# Altium PCB B&D PFC.PcbDoc
Units mil, origin at the board's own origin, x right, y up, seen from the top; angles counter-clockwise.
Board outline 2277 x 1677 mil, 2 copper layers (TopLayer, BottomLayer); 52 components, 31 nets, 197 pads, 23 vias.
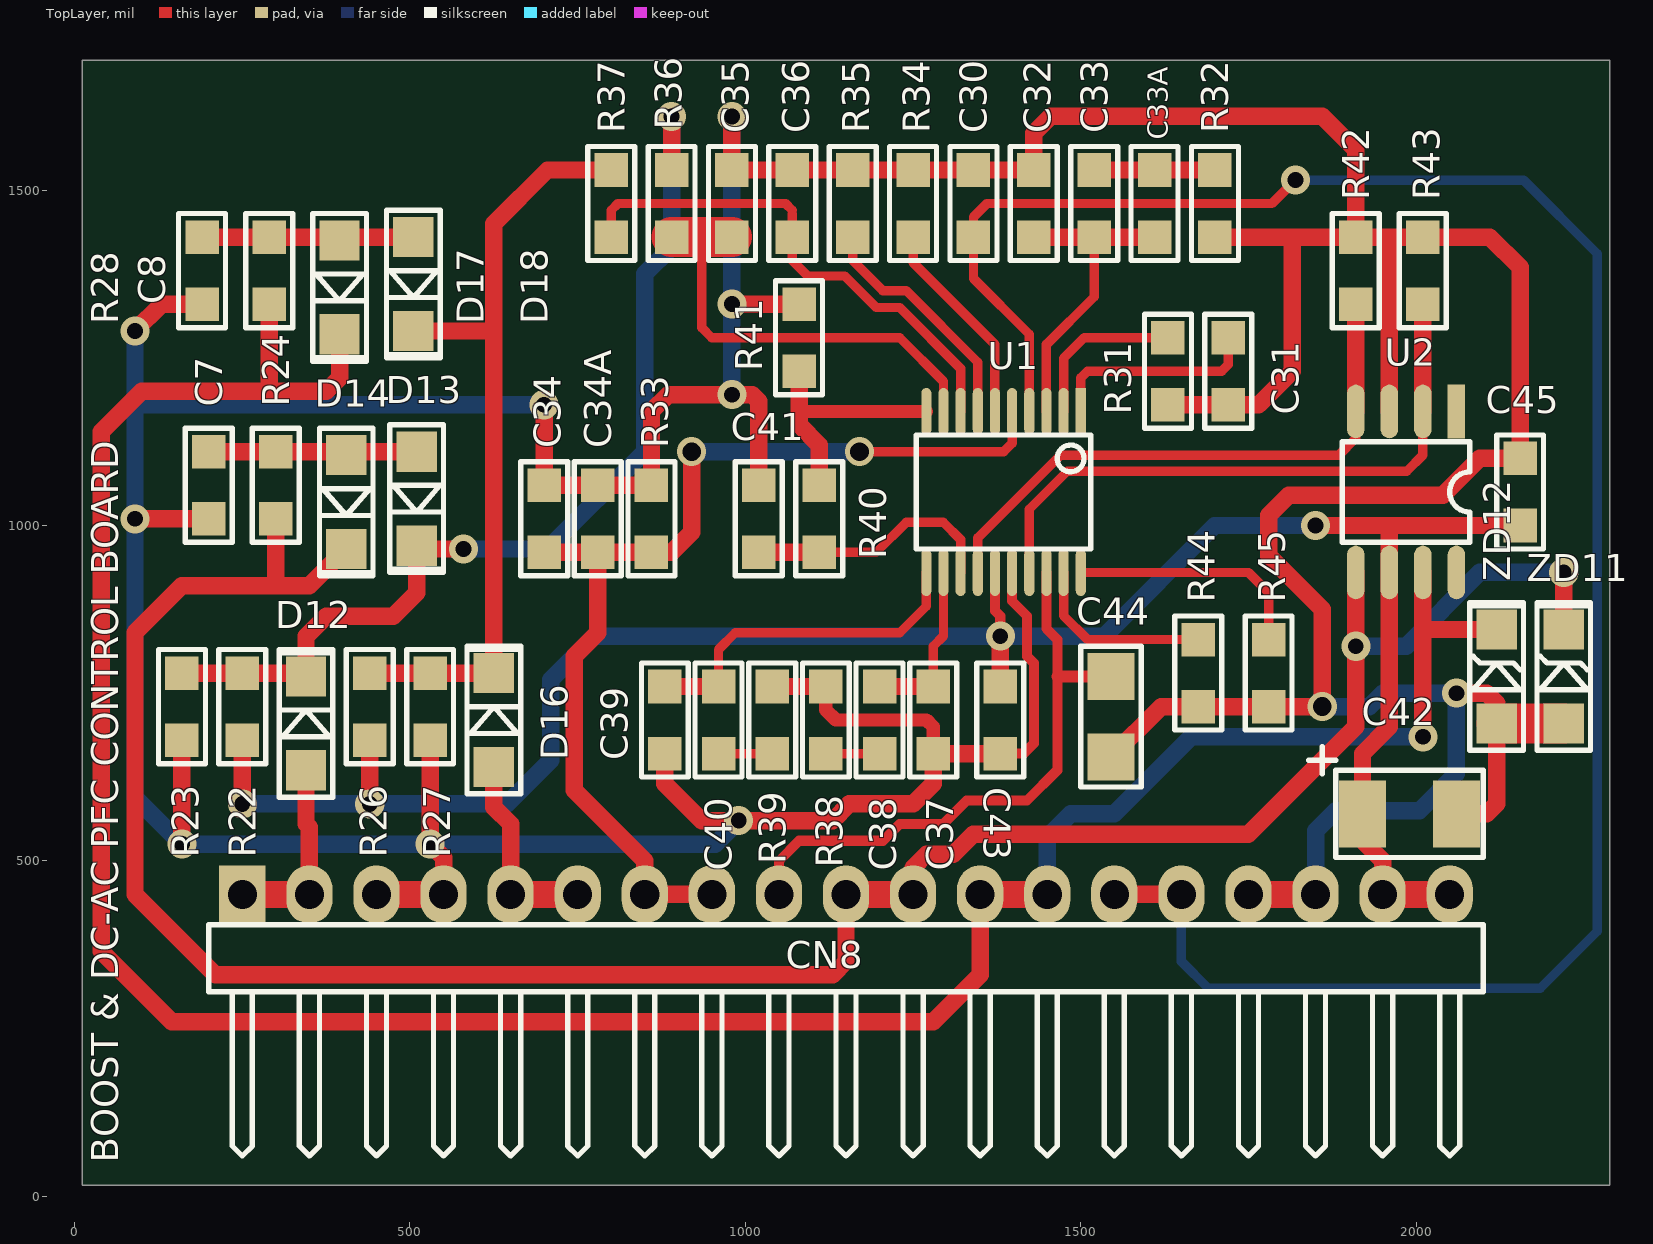
[diagram p0: TopLayer view]
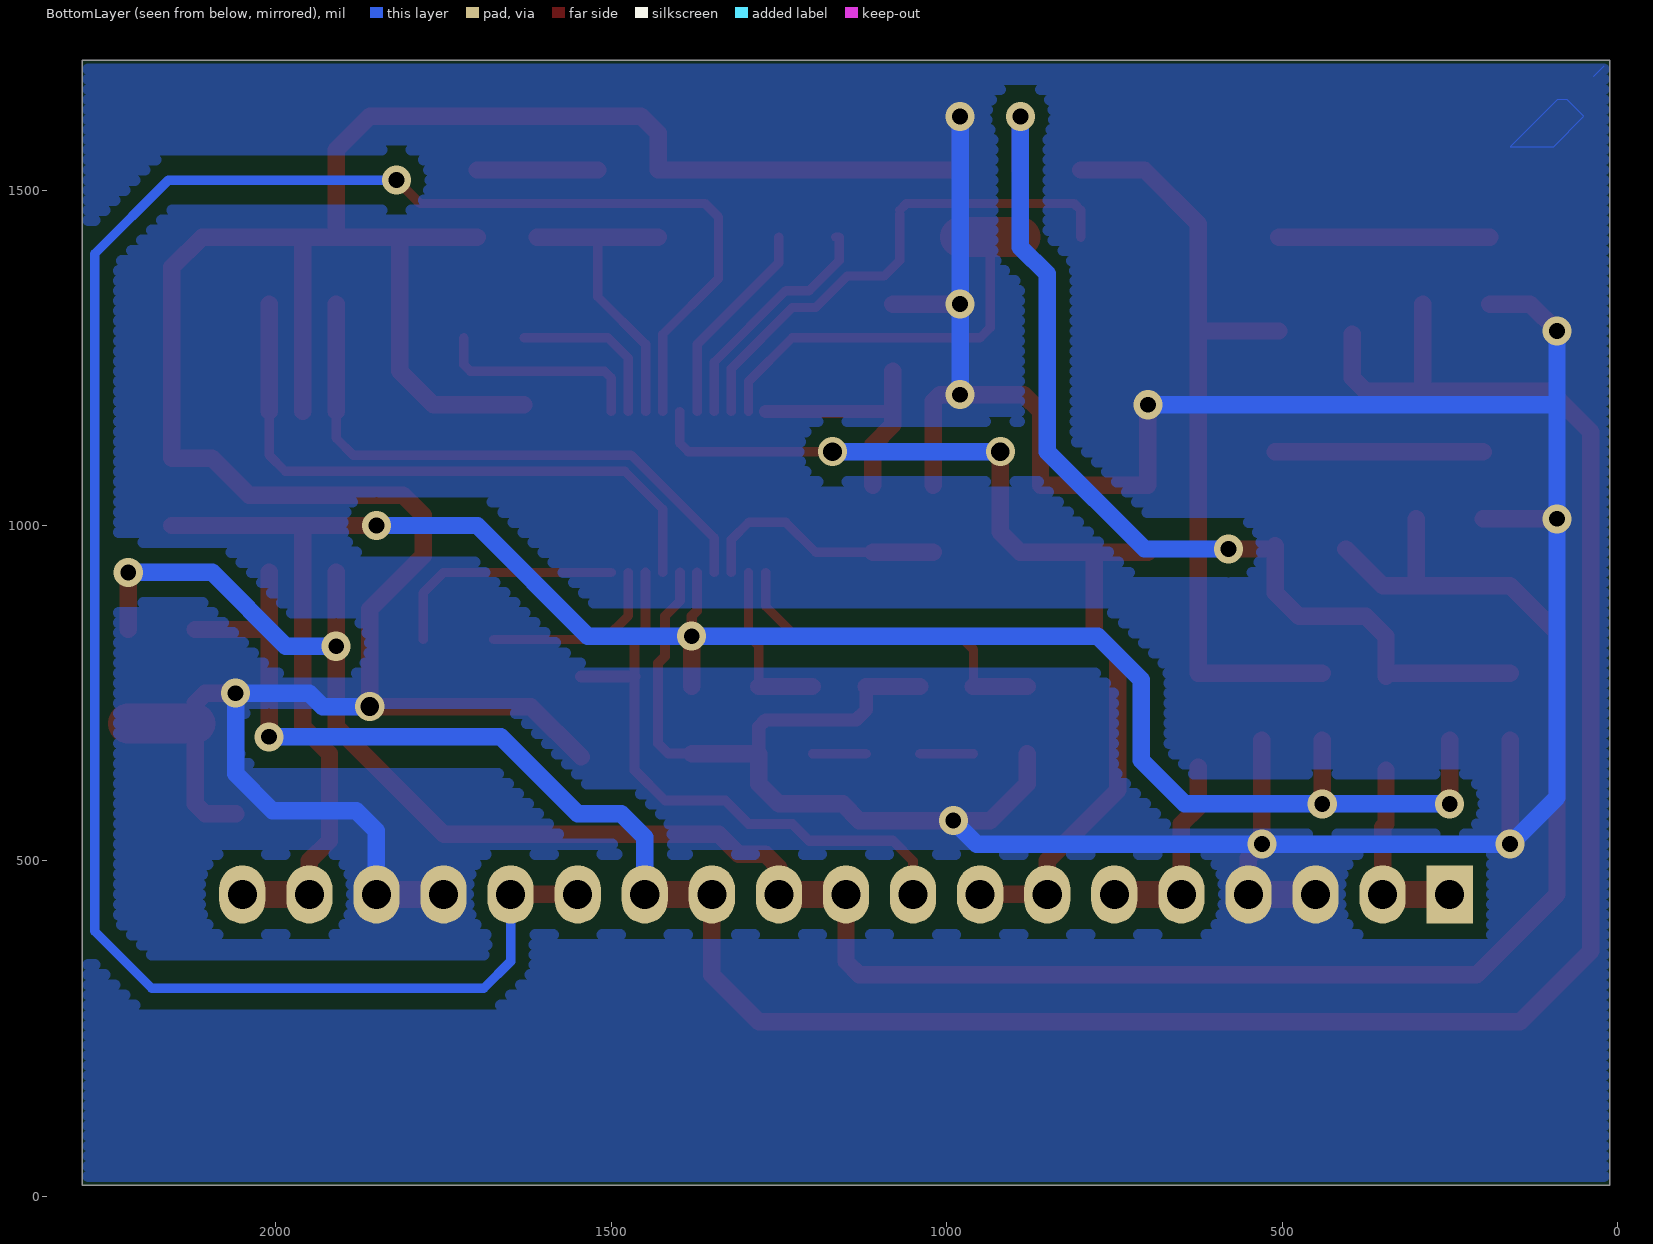
[diagram p1: BottomLayer view, seen from below]

## Layer stack, top to bottom
TopSolder: solder mask 0.4, Solder Resist, Dk 3.5
TopLayer: signal copper 1.4
Dielectric1: dielectric 12.6, FR-4, Dk 4.8
BottomLayer: signal copper 1.4
BottomSolder: solder mask 0.4, Solder Resist, Dk 3.5

## Board outline
11.5,16.5 2288.5,16.5 2288.5,1693.5 11.5,1693.5

## Design rules (kind name [scope] priority, off if disabled: settings)
Clearance Clearance_1 [All vs (InPoly)] p1: gap=20 ignorepadtopadclearanceinfootprint=FALSE
Clearance [All] p2: gap=10 ignorepadtopadclearanceinfootprint=FALSE
FabricationTestPointUsage TestPointUsage [All] p1: valid=0 allowmultiple=FALSE
FabricationTestpoint Testpoint [All] p1: side=3 testpointundercomponent=TRUE minsize=40 maxsize=100 preferedsize=60 minholesize=20 maxholesize=40 preferedholesize=32 testpointgrid=1 allowsidetop=TRUE allowsidebottom=TRUE usegrid=TRUE gridtolerance=0.01
PolygonConnect PolygonConnect_1 [All] p1: connectstyle=Direct reliefconductorwidth=10 reliefentries=4 polygonreliefangle="90 Angle" airgapwidth=10
RoutingVias [All] p1: holewidth=28 width=43.31 viastyle="Through Hole" minholewidth=28 minwidth=39.37 maxholewidth=39.37 maxwidth=47.24
SolderMaskExpansion SolderMaskExpansion_3 [(InPoly)] p1: expansion=20
SolderMaskExpansion [All] p2: expansion=5
Width [All] p1: maxlimit=300 minlimit=10 preferedwidth=15
28 further rules are at their usual default settings.

## Classes and differential pairs
component class RTFPow: C43 PC41 RM
component class RTFMain: CY5 CY6 R2 RM
component class PFPower: C7 CY5 F.S1 LED1 P1 PC1 PT1 R2 RM U1 U2 U4 ZNR1
component class IA02-71Power&Output: C7 C29A CN9 F.S1 JP1 JP1(NM) JP2 JP3 P2 PC1 PC2 R2 RM RY1 RY2 U1 U4 U6 ZNR1
component class IA02-53Power&Output: C7 C29A CN9 F.S1 JP1 JP1(NM) JP2 JP3 P2 PC1 PC2 R2 RM RY1 RY2 U1 U4 U6 ZNR1
component class IA02-52Power&Output: C7 C29A CN9 F.S1 JP1 JP1(NM) JP2 JP3 P2 PC1 PC2 R2 RM RY1 RY2 U1 U4 U6 ZNR1
component class IA02-34Power&Output: C7 C29A CN9 F.S1 JP1 JP1(NM) JP2 JP3 P2 R2 RM RY1 RY2 U1 U4 U6
component class Power&Out: C7 C29A CN9 F.S1 JP1 JP1(NM) JP2 JP3 P2 R2 RM RY1 RY2 U1 U4 U6
component class Power&COM: C7 C9 C29A F.S1 P1 PC1 R2 RM U1 U2 U4 U6 U8
component class Power&Communication: C7 C9 C29A F.S1 J32 P1 PC1 R2 RM U1 U2 U4 U6
component class Power: C7 C29A F.S1 J31 P1 R2 RM U1 U6
component class RLY+AO: C7 C29A CN2-2 F.S1 JP1 JP1(NM) JP2 JP3 P2 R2 RM RY1 RY2 U1 U4 U6
component class IA02-33Power&Output: C7 C29A CN9 F.S1 JP1 JP1(NM) JP2 JP3 P2 R2 RM RY1 RY2 U1 U4 U6
component class IA02-41Power&Output: C7 C29A CN9 F.S1 JP1 JP1(NM) JP2 JP3 P2 PC1 R2 RM RY1 RY2 U1 U4 U6 ZNR1
component class IA02-51Power&Output: C7 C29A CN9 F.S1 JP1 JP1(NM) JP2 JP3 P2 PC1 R2 RM RY1 RY2 U1 U4 U6 ZNR1
component class IA02-61Power&Output: C7 C29A CN9 F.S1 JP1 JP1(NM) JP2 JP3 P2 PC1 PC2 R2 RM RY1 RY2 U1 U4 U6 ZNR1
component class SMCPower: C7 CN7 CY5 F.S1 LED1 P1 PC1 R2 RM U1 U2 U4 ZNR1
component class BCEMain: CY5 CY6 PT1 R2 RM
component class BCEPow: C43 PC41 RM

## Components (designator, comment, footprint, x,y, rotation, side; value= is the part's Value field where it differs from the comment)
C7 "0.047U" 2012(0805)-2.54 200,1060 r270 top
C8 "0.047U" 2012(0805)-2.54 190,1380 r270 top
C30 "3300P" 2012(0805)-2.54 1340,1480 r270 top
C31 "470P" 2012(0805)-2.54 1720,1230 r90 top
C32 "0.15U" 2012(0805)-2.54 1430,1480 r270 top
C33 "0.47U" 2012(0805)-2.54 1520,1480 r270 top
C33A "1U" 2012(0805)-2.54 1610,1480 r270 top
C34 "1000P" 2012(0805)-2.54 700,1010 r90 top
C34A "220P" 2012(0805)-2.54 780,1010 r90 top
C35 "220P" 2012(0805)-2.54 980,1480 r90 top
C36 "220P" 2012(0805)-2.54 1070,1480 r90 top locked
C37 "1000P" 2012(0805)-2.54 1280,710 r270 top
C38 "2200P" 2012(0805)-2.54 1200,710 r90 top
C39 "1000P" 2012(0805)-2.54 880,710 r90 top
C40 "2200P" 2012(0805)-2.54 960,710 r90 top
C41 "0.1U" 2012(0805)-2.54 1020,1010 r270 top
C42 "10U/16V" "CAP P 3528" 1990,570 r0 top
C43 "0.1U" 2012(0805)-2.54 1380,710 r270 top
C44 "10U/10V" 3216(1206)-3.05 1545,715 r90 top
C45 "0.1U" 2012(0805)-2.54 2155,1050 r90 top
CN8 "PIN HDR 1*19-90" "PIN HDR 1*19-90" 1150,450 r0 top locked
D12 "1N4148" D3515 345,705 r90 top
D13 "1N4148" D3515 510,1040 r270 top
D14 "1N4148" D3515 405,1035 r270 top
D16 "1N4148" D3515 625,710 r90 top
D17 "1N4148" D3515 505,1360 r270 top
D18 "1N4148" D3515 395,1355 r270 top
R22 "3.6K" 2012(0805)-2.54 250,730 r90 top
R23 "20" 2012(0805)-2.54 160,730 r90 top
R24 "3K" 2012(0805)-2.54 300,1060 r90 top
R26 "3.6K" 2012(0805)-2.54 440,730 r90 top
R27 "20" 2012(0805)-2.54 530,730 r90 top
R28 "3K" 2012(0805)-2.54 290,1380 r90 top
R31 "56K" 2012(0805)-2.54 1630,1230 r270 top
R32 "100K" 2012(0805)-2.54 1700,1480 r90 top
R33 "24K" 2012(0805)-2.54 860,1010 r270 top
R34 "20K" 2012(0805)-2.54 1250,1480 r90 top
R35 "39K" 2012(0805)-2.54 1160,1480 r270 top
R36 "1K" 2012(0805)-2.54 890,1480 r90 top locked
R37 "1K" 2012(0805)-2.54 800,1480 r90 top locked
R38 "3.9K" 2012(0805)-2.54 1120,710 r270 top
R39 "3.9K" 2012(0805)-2.54 1040,710 r270 top
R40 "3.3K" 2012(0805)-2.54 1110,1010 r270 top
R41 "5.1K" 2012(0805)-2.54 1080,1280 r270 top
R42 "10K" 2012(0805)-2.54 1910,1380 r270 top
R43 "10K" 2012(0805)-2.54 2010,1380 r90 top
R44 "220K" 2012(0805)-2.54 1675,780 r270 top
R45 "1K" 2012(0805)-2.54 1780,780 r270 top
U1 "UCC28070" TSSOP20-240-0.65 1500,1170 r180 top
U2 "IXDN602" SO8-240-1.27 2060,1170 r180 top
ZD11 "18V" DZ3515-3.56 2220,775 r90 top
ZD12 "18V" DZ3515-3.56 2120,775 r90 top

## Footprints (in the part's own frame and the unit in brackets; to place one, negate y for a bottom-side part, rotate by r counter-clockwise, add the part's x,y. Pads: shape width x height; smd on the part's side, far side on the other; paste and mask are expansions set on the pad)
2012(0805)-2.54 [mm]
  rect 1.27x1.27 smd: 1(-1.27,0) 2(1.27,0)
  round 0.3 on Mech4: ""(0,0)
  silkscreen extent -2.16,-0.89 2.16,0.89
3216(1206)-3.05 [mil]
  rect 70x70 smd: 1(-60,0) 2(60,0)
  round 11.81 on Mech4: ""(0,0)
  silkscreen extent -105,-45 105,45
"CAP P 3528" [mil]
  rect 70x100 smd: 1(-70,0) 2(70,0)
  round 11.81 on Mech4: ""(0,0)
  silkscreen extent -150,-65 110,100
D3515 [mil]
  rect 60x60 smd: 1(-70,0) 2(70,0)
  round 11.81 on Mech4: ""(0,0)
  silkscreen extent -110,-40 110,40
DZ3515-3.56 [mil]
  rect 60x60 smd: 1(-70,0) 2(70,0)
  round 11.81 on Mech4: ""(0,0)
  silkscreen extent -110,-40 110,40
"PIN HDR 1*19-90" [mm]
  rect 1.75x2.2 hole 1.1: 1(-22.86,0)
  oval 1.75x2.2 hole 1.1: 2(-20.32,0) 3(-17.78,0) 4(-15.24,0) 5(-12.7,0) 6(-10.16,0) 7(-7.62,0) 8(-5.08,0) 9(-2.54,0) 10(0,0) 11(2.54,0) 12(5.08,0) 13(7.62,0) 14(10.16,0) 15(12.7,0) 16(15.24,0) 17(17.78,0) 18(20.32,0) 19(22.86,0)
  round 0.3 on Mech4: ""(0,0)
  silkscreen extent -24.13,-9.91 24.13,-1.14
SO8-240-1.27 [mil]
  rect 26x80 smd: 1(0,0)
  oval 26x80 smd: 2(50,0) 3(100,0) 4(150,0) 5(150,240) 6(100,240) 7(50,240) 8(0,240)
  round 11.81 on Mech4: ""(75,120)
  silkscreen extent -20,45 170,195
TSSOP20-240-0.65 [mil]
  rect 15x70 smd: 1(0,0)
  oval 15x70 smd: 2(25.59,0) 3(51.18,0) 4(76.77,0) 5(102.36,0) 6(127.95,0) 7(153.54,0) 8(179.13,0) 9(204.72,0) 10(230.32,0) 11(230.32,240) 12(204.72,240) 13(179.13,240) 14(153.54,240) 15(127.95,240) 16(102.36,240) 17(76.77,240) 18(51.18,240) 19(25.59,240) 20(0,240)
  round 11.81 on Mech4: ""(115.16,120)
  silkscreen extent -15,35 245,205

## Via types
v1: diameter 43.31, hole 23.62, TopLayer to BottomLayer, 20 vias
v2: diameter 43.31, hole 28, TopLayer to BottomLayer, 3 vias

## Nets (pads, with @x,y where several pads share a name; then routed paths per layer and width w, separated by ;. In a path a pad name is that pad's centre, name@x,y a point inside that pad or via, vN(x,y) a via of type N, cw(c..) or ccw(c..) an arc to the next point about the centre after c; other vN are vias at no path point)
+12V1: C42.1 C43.1 C45.1 CN8.18 CN8.19 R22.1 R26.1 U1.15 U2.6 | length 3195.7
  TopLayer w14: 1945,1000 1960,985
  TopLayer w15: U1.15 1372.05,872.95 1380,865 v1(1380,835)
  TopLayer w26: v1(250,585) R22.1 ; v1(440,585) R26.1 ; C43.1 v1(1380,835) ; v1(1850,1000) C45.1 ; CN8.18 1950,500 1920,530 1920,660 1960,700 1960,985
  TopLayer w40: CN8.18 CN8.19
  BottomLayer w26: v1(250,585) 645,585 710,650 710,770 775,835 1535,835 1700,1000 v1(1850,1000)
CSA: CN8.1 CN8.2 D12.1 | length 287.1
  TopLayer w26: D12.1 345,555 350,550 CN8.2
  TopLayer w40: CN8.1 CN8.2
CSB: CN8.5 CN8.6 D16.1 | length 300.4
  TopLayer w26: D16.1 625,580 650,555 CN8.5
  TopLayer w40: CN8.5 CN8.6
GDA: CN8.10 CN8.11 D14.2 R24.1 U2.5 ZD11.2 | length 3632.3
  TopLayer w26: 300,910 R24.1 ; D14.2 350,910 160,910 90,840 90,450 210,330 1130,330 1150,350 CN8.10 ; CN8.11 1250,490 1270,510 1310,510 1340,540 1450.91,540 1750,540 1910,700 U2.5 ; ZD11.2 v1(2220,930)
  TopLayer w40: CN8.10 CN8.11
  BottomLayer w26: v1(1910,820) 1985,820 2095,930 v1(2220,930)
GDB: CN8.12 CN8.13 D18.2 R28.1 U2.7 ZD12.2 | length 4022.8
  TopLayer w26: 290,1200 R28.1 ; D18.2 395,1220 375,1200 100,1200 40,1140 40,365 145,260 1280,260 1350,330 CN8.12 ; v1(2010,685) U2.7 ; 2010,845 ZD12.2
  TopLayer w40: CN8.12 CN8.13
  BottomLayer w26: CN8.13 1450,535 1485,570 1550,570 1665,685 v1(2010,685)
NetC8_1: C8.1 D17.1 D18.1 R28.2 | length 315
  TopLayer w26: C8.1 D17.1
NetC31_2: C31.2 U1.1 | length 318.3
  TopLayer w14: U1.1 1500,1220 1510,1230 1710,1230 1720,1240 C31.2
NetC33A_2: C32.2 C33.2 C33A.2 U1.3 | length 469.5
  TopLayer w14: U1.3 1448.82,1270 1520,1341.18 C33.2
  TopLayer w26: C32.2 C33A.2
NetC38_1: C38.1 R38.2 | length 80
  TopLayer w14: R38.2 C38.1
NetD13_2: D12.2 D13.2 R22.2 R23.2 R36.2 | length 1505.6
  TopLayer w26: R23.2 340,780 D12.2 345,835 375,865 475,865 510,900 D13.2 ; D13.2@510,965 v1(580,965) ; R36.2 v1@890,1595 ; 890,1580 v1(890,1610)
  BottomLayer w26: v1(580,965) 705,965 850,1110 850,1375 890,1415 v1@890,1595
NetR24_2: C7.1 D13.1 D14.1 R24.2 | length 310
  TopLayer w26: C7.1 D13.1
NetR31_1: R31.1 U1.2 | length 247.7
  TopLayer w14: U1.2 1474.41,1249.41 1505,1280 R31.1
NetR32_2: C33.1 C33A.1 R32.2 | length 180
  TopLayer w26: C33.1 R32.2
NetR34_1: R34.1 U1.6 | length 310.6
  TopLayer w14: R34.1 1250,1392.05 1372.05,1270 U1.6
NetR35_2: R35.2 U1.7 | length 362.7
  TopLayer w14: R35.2@1165,1430 R35.2 1160,1395 1205,1350 1240,1350 1346.46,1243.54 U1.7
NetR36_1: C35.1 R36.1 U1.9 | length 663.3
  TopLayer w14: 935,1430 935,1295 950,1280 1230,1280 1295.28,1214.72 U1.9
  TopLayer w60: R36.1 C35.1
NetR37_1: C36.1 R37.1 U1.8 | length 769.9
  TopLayer w14: R37.1 800,1470 810,1480 1060,1480 1070,1470 ; 1070,1465 1070,1395 1093,1372 1148,1372 1195,1325 1230,1325 1320.87,1234.13 U1.8
NetR37_2: D16.2 D17.2 R26.2 R27.2 R37.2 | length 1183.1
  TopLayer w26: R26.2 D16.2 625,1450 705,1530 R37.2 ; D17.2 625,1290
NetR39_2: C40.1 R39.2 | length 80
  TopLayer w14: C40.1 R39.2
NetR40_2: C41.2 R40.2 U1.13 | length 379.4
  TopLayer w14: R40.2 1195,960 1240,1005 1295,1005 1320.87,979.13 U1.13
  TopLayer w26: C41.2 R40.2
NetR41_2: R40.1 R41.2 U1.10 | length 367.1
  TopLayer w20: 1085,1170 U1.10
  TopLayer w26: R41.2 1080,1150 1110,1120 R40.1
NetU1_11: C39.2 C40.2 U1.11 | length 521.8
  TopLayer w14: C40.2 960,815 985,840 1230,840 1269.68,879.68 U1.11
  TopLayer w26: C39.2 C40.2
NetU1_12: C37.1 C38.2 U1.12 | length 256.3
  TopLayer w14: C37.1 1280,820 1295.28,835.28 U1.12
  TopLayer w26: C38.2 C37.1
NetU1_19: R44.1 U1.19 | length 279.7
  TopLayer w14: U1.19 1474.41,865.59 1510,830 R44.1
NetU1_20: R45.1 U1.20 | length 362.4
  TopLayer w14: U1.20 1750,930 1780,900 R45.1
NetU2_2: R43.1 U1.17 U2.2 | length 939.5
  TopLayer w14: U1.17 1423.23,1024.29 1479.94,1081 1986,1081 2010,1105 U2.2
  TopLayer w26: U2.2 R43.1
NetU2_4: R42.2 U1.14 U2.4 | length 876.5
  TopLayer w14: U1.14 1346.46,981.46 1470,1105 1885,1105 1910,1130 U2.4
  TopLayer w26: U2.4 R42.2
PGND: C7.2 C8.2 C30.1 C31.1 C32.1 C34.2 C34A.2 C35.2 C36.2 C37.2 C39.1 C41.1 C42.2 C43.2 C44.1 C45.2 CN8.3 CN8.4 CN8.16 CN8.17 R23.1 R27.1 R31.2 R32.1 R33.1 R34.2 R35.1 R38.1 R39.1 R41.1 R42.1 R43.2 R44.2 R45.2 U1.16 U2.3 ZD11.1 ZD12.1 | length 10334.1
  TopLayer w15: C43.2 1415,660 1430,675 1430,795 1420,805 1420,865 1397.64,887.36 U1.16
  TopLayer w20: R38.1 1120,725 1135,710 1270,710 1280,700 C37.2
  TopLayer w26: v1(90,1010) C7.2 ; v1(90,1290) 130,1330 C8.2 ; v1(160,525) R23.1 ; R27.1 v1(530,525) 550,505 CN8.4 ; v1(700,1180) C34.2 R33.1 860,1170 885,1195 v1(980,1195) 1010,1195 1020,1185 C41.1 ; C39.1 880,615 935,560 1130,560 1155,585 1250,585 1280,615 C37.2 C43.2 ; v1(980,1330) R41.1 ; v1(980,1610) C35.2 C32.1 1430,1585 1455,1610 1760,1610 1860,1610 1910,1560 R42.1 ; R39.1 R38.1 ; C44.1 1620,730 v2(1860,730) 1860,875 1780,955 1780,1015 1810,1045 2015,1045 2040,1045 2095,1100 C45.2 2155,1385 2110,1430 R32.1 ; R31.2 1765,1180 1815,1230 1815,1430 ; U2.3 1960,1430 ; C42.2 2105,570 2120,585 ZD12.1 2120,735 2105,750 v1(2060,750)
  TopLayer w40: CN8.3 CN8.4 ; CN8.16 CN8.17
  TopLayer w60: ZD12.1 ZD11.1
  BottomLayer w26: 90,1180 v1(700,1180) ; v1(90,1290) 90,595 v1(160,525) 955,525 v1(990,560) ; v1(980,1195) v1(980,1610) ; CN8.17 1850,545 1880,575 2005,575 2060,630 v1(2060,750) 1950,750 1930,730 v2(1860,730)
SS: C44.2 CN8.9 U1.18 | length 902.6
  TopLayer w15: CN8.9 1050,500 1080,530 1205,530 1230,555 1295,555 1330,590 1420,590 1465,635 1465,830 1448.82,846.18 U1.18
  TopLayer w18: 1465,775 C44.2
VINAC: C34.1 C34A.1 CN8.7 CN8.8 R33.2 U1.5 | length 1550.7
  TopLayer w14: v2(1170,1110) 1385,1110 1397.64,1122.64 U1.5
  TopLayer w26: C34.1 890,960 920,990 v2(920,1110) ; C34A.1 780,840 745,805 745,605 850,500 CN8.7 CN8.8
  BottomLayer w26: v2(920,1110) v2(1170,1110)
VSENSE: C30.2 CN8.14 CN8.15 U1.4 | length 3204.6
  TopLayer w14: U1.4 1423.23,1285 1340,1368.23 1340,1460 1360,1480 1785,1480 v1(1820,1515)
  TopLayer w26: CN8.14 CN8.15
  BottomLayer w14: CN8.15 1650,350 1690,310 2185,310 2270,395 2270,1405 2160,1515 v1(1820,1515)
pads on no net: C7. C8. C30. C31. C32. C33. C33A. C34. C34A. C35. C36. C37. C38. C39. C40. C41. C42. C43. C44. C45. CN8. D12. D13. D14. D16. D17. D18. R22. R23. R24. R26. R27. R28. R31. R32. R33. R34. R35. R36. R37. R38. R39. R40. R41. R42. R43. R44. R45. U1. U2. U2.1 U2.8 ZD11. ZD12.

## Polygon pours and split planes (outlines as drawn)
PGND on BottomLayer "BottomLayer-PGND" (hatched Horizontal grid 15 track 17, remove dead copper, pour order 6): 20,1685 2280,1685 2280,25 20,25
PGND on BottomLayer "BottomLayer-PGND 1" (hatched Horizontal grid 17 track 15, remove dead copper, pour order 4): 35,1670 20,1685
PGND on BottomLayer "BottomLayer-PGND 2" (hatched Horizontal grid 17 track 15, remove dead copper, pour order 2): 90,1635 160,1565 95,1565 50,1610 75,1635
no net on BottomLayer "BottomLayer-No Net" (hatched Horizontal grid 15 track 17, remove dead copper, pour order 0): 15,1635
no net on TopOverlay (hatched Vertical grid 10 track 12): 41482.8,45780
no net on TopOverlay (hatched Vertical grid 10 track 12): 41482.8,45780
no net on TopOverlay (hatched Vertical grid 10 track 12): 55552.8,53400
no net on MultiLayer (hatched Vertical grid 10 track 12): 44967.8,52870
no net on MultiLayer (hatched Vertical grid 10 track 12): 39877.8,51050

## Silkscreen, mask and mechanical layers (free items; w line width, h text height)
TopOverlay:
  text "BOOST & DC-AC PFC CONTROL BOARD" at 65,50 h40 r90
Mechanical1:
  lines w10: 0,0 0,1700 2300,1700 2300,0 0,0
Mechanical2:
  lines w7.87: 0,1760 0,1840 ; 60,1780 0,1800 ; 60,1820 0,1800 ; 975.32,1800 0,1800 ; 1324.68,1800 2300,1800 ; 2240,1780 2300,1800 ; 2240,1820 2300,1800 ; 2300,1760 2300,1840 ; 2360,0 2440,0 ; 2360,1700 2440,1700 ; 2380,60 2400,0 ; 2380,1640 2400,1700 ; 2400,680.03 2400,0 ; 2400,1019.97 2400,1700 ; 2420,60 2400,0 ; 2420,1640 2400,1700
  lines w10: 0,450 2300,450 ; 1150,-40 1150,1690
  text "2300mil" at 985.32,1762.58 h60
  text "1700mil" at 2437.42,690.03 h60 r90